# Altium PCB BrushlessMiniModule.PcbDoc
Units mm, origin at the board's own origin, x right, y up, seen from the top; angles counter-clockwise.
Board outline 47 x 47 mm, 2 copper layers (Top Layer, Bottom Layer), stack 1.571 mm thick; 39 components, 29 nets, 126 pads, 60 vias.
Unrouted connection lines stored in the file: 2.
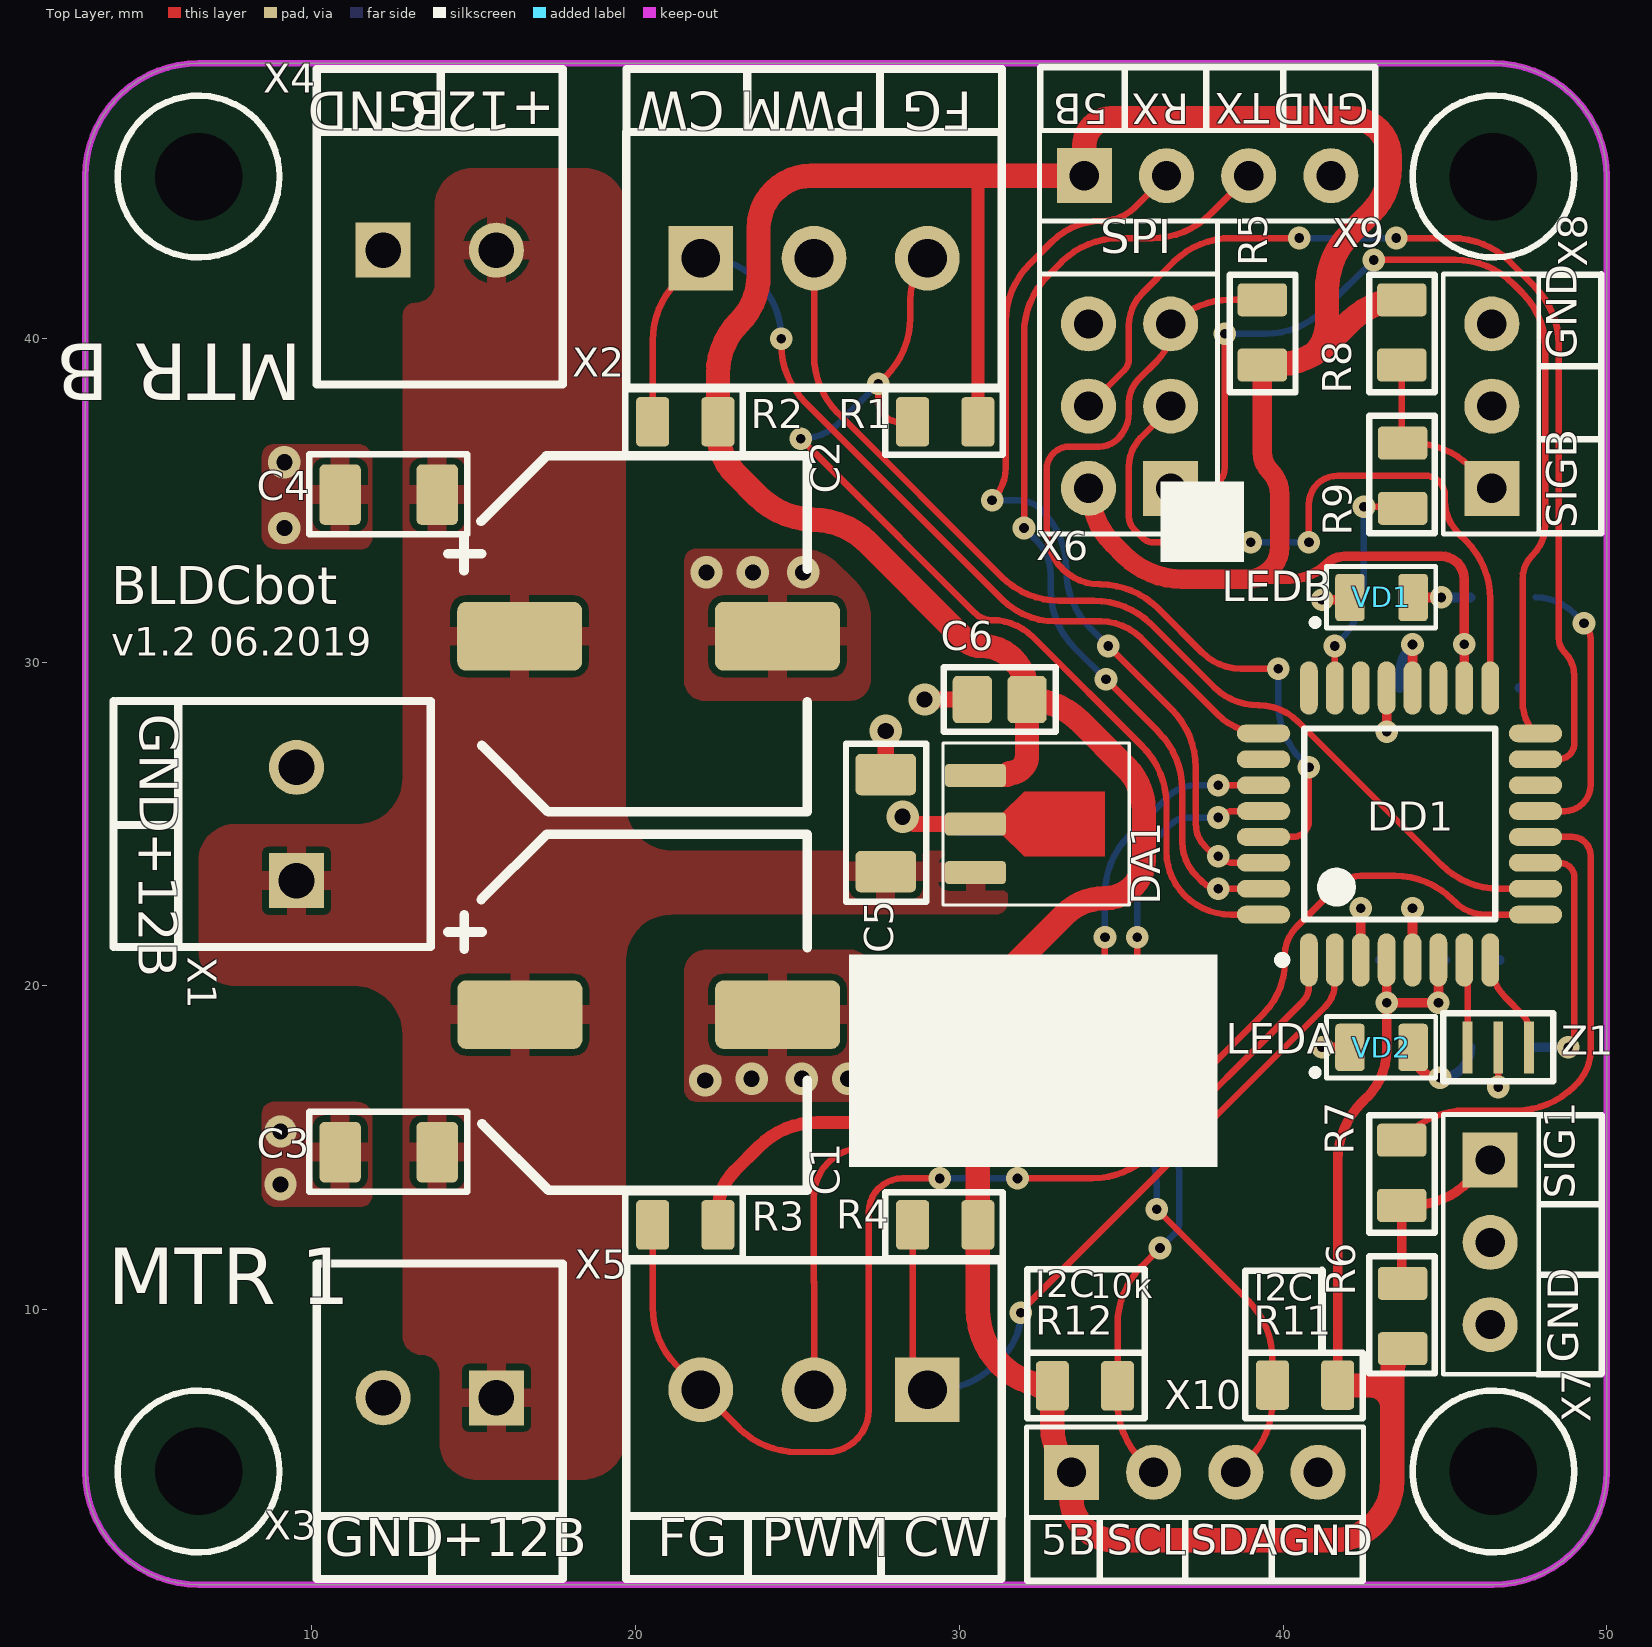
[diagram p0: Top Layer view]
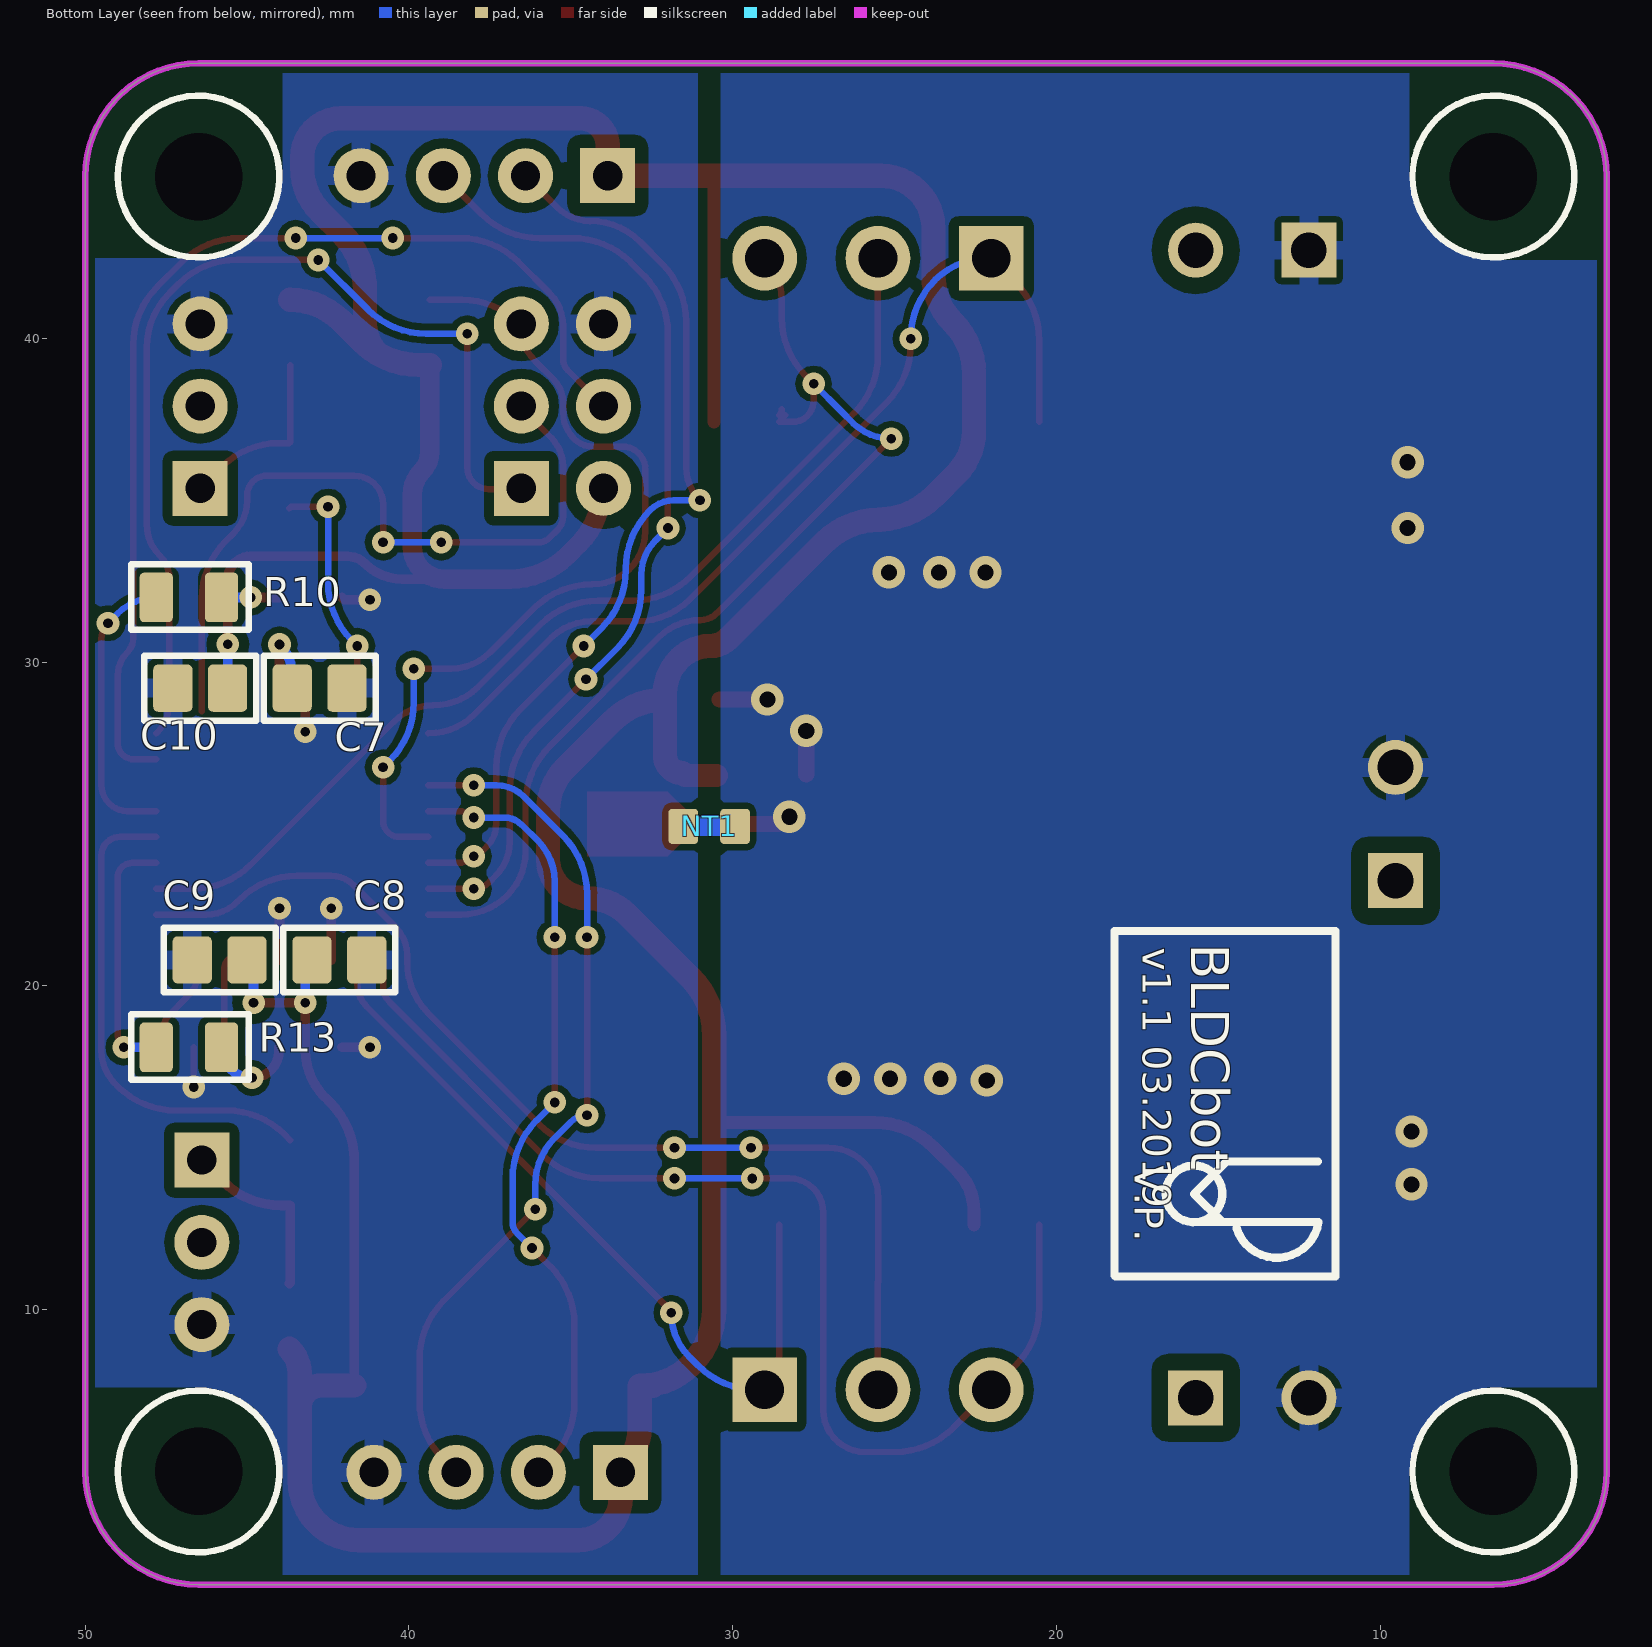
[diagram p1: Bottom Layer view, seen from below]

## Layer stack, top to bottom
Top Solder: solder mask 0.0102, Solder Resist, Dk 3.5
Top Layer: signal copper 0.0356
Dielectric 1: dielectric 1.5, FR-4, Dk 4.8
Bottom Layer: signal copper 0.0356
Bottom Solder: solder mask 0.0102, Solder Resist, Dk 3.5

## Board outline
3,5 3,45 cw(c6.5,45) 6.5,48.5 46.5,48.5 cw(c46.5,45) 50,45 50,5 cw(c46.5,5) 46.5,1.5 6.5,1.5 cw(c6.5,5)

## Design rules (kind name [scope] priority, off if disabled: settings)
Clearance Clearance_POWER_12B [InNet('12B') vs InNet('GND')] p1: gap=0.5
Clearance Clearance_POWER_5B [InNet('5B') vs InNet('DGND')] p2: gap=0.3 except(0.2: SMDPad-SMDPad; 0.4: Arc-THPad Track-THPad THPad-THPad THPad-Fill THPad-Poly THPad-Region)
Clearance [All] p3: gap=0.2 except(0.3: Arc-THPad Track-THPad THPad-THPad THPad-Via THPad-Fill THPad-Poly THPad-Region THPad-Text)
HoleSize [All] p1: absolutevalues=TRUE maxlimit=5 minlimit=0.2 maxpercent=80.000 minpercent=20.000
HoleToHoleClearance [All] p1: gap=0 allowstackedmicrovias=TRUE
MinimumSolderMaskSliver [All] p1: minsoldermaskwidth=0.15
PolygonConnect NetTieDirect [InComponentClass('NetTieDirect')] p1: connectstyle=Direct reliefconductorwidth=0.254 reliefentries=4 polygonreliefangle="90 Angle" airgapwidth=0.254
PolygonConnect NetTieRelief [InComponentClass('NetTieRelief')] p2: connectstyle=Direct reliefconductorwidth=0.6 reliefentries=4 polygonreliefangle="90 Angle" airgapwidth=0.2
PolygonConnect PolygonConnect_GND [HasFootprint('TERMINAL 2 way-5mm') vs InNet('GND')] p3: connectstyle=Direct reliefconductorwidth=0.6 reliefentries=4 polygonreliefangle="90 Angle" airgapwidth=0.2
PolygonConnect PolygonConnect_GND_12B [HasFootprint('TERMINAL 2 way-5mm') vs InNet('12B')] p4: connectstyle=Direct reliefconductorwidth=0.6 reliefentries=4 polygonreliefangle="90 Angle" airgapwidth=0.2
PolygonConnect PolygonConnect_GND_12B_1 [HasFootprint('TERMINAL 3 way-3.5mm') vs InNet('12B')] p5: connectstyle=Direct reliefconductorwidth=0.6 reliefentries=4 polygonreliefangle="90 Angle" airgapwidth=0.2
PolygonConnect PolygonConnect_GND_1 [HasFootprint('TERMINAL 3 way-3.5mm') vs InNet('GND')] p6: connectstyle=Direct reliefconductorwidth=0.6 reliefentries=4 polygonreliefangle="90 Angle" airgapwidth=0.2
PolygonConnect PolygonConnect_via [IsVia] p7: connectstyle=Direct reliefconductorwidth=0.6 reliefentries=4 polygonreliefangle="90 Angle" airgapwidth=0.2
PolygonConnect [All] p8: connectstyle=Relief reliefconductorwidth=0.6 reliefentries=4 polygonreliefangle="90 Angle" airgapwidth=0.2
RoutingVias [All] p1: holewidth=0.711 width=1.27 viastyle="Through Hole" minholewidth=0.711 minwidth=1.27 maxholewidth=0.711 maxwidth=1.27
SilkToSilkClearance [All] p1: silktosilkclearance=0
SilkToSolderMaskClearance [IsPad] p1: minsilkscreentomaskgap=0 clearancetoexposedcopper=TRUE
SolderMaskExpansion [All] p1: expansion=0.05
Width [All] p1: maxlimit=3 minlimit=0.2 preferedwidth=0.3
25 further rules are at their usual default settings.

## Components (designator, comment, footprint, x,y, rotation, side; value= is the part's Value field where it differs from the comment)
C1 "Capacitor_pol" Cap_SMD_radial_polar(10x10.5) 20.406,19.111 r90 top
C2 "Capacitor_pol" Cap_SMD_radial_polar(10x10.5) 20.4,30.8 r90 top
C3 "Capacitor" C1206 12.4,14.886 r0 top
C4 "Capacitor" C1206 12.4,35.2 r0 top
C5 "Capacitor" C1206 27.75,25 r270 top
C6 "Capacitor" C0805 31.247,28.846 r0 top
C7 "Capacitor" C0805 42.763,29.197 r0 bottom
C8 "Capacitor" C0805 42.15,20.8 r0 bottom
C9 "Capacitor" C0805 45.85,20.8 r180 bottom
C10 "Capacitor" C0805 46.45,29.197 r180 bottom
DA1 "L78L05ABUTR" SOT-89-3 30.5,25 r270 top
DD1 "ATmega328P-AU" TQFP-32 43.6,25 r90 top
NT1 "" Pofigistor0603 30.725,24.925 r0 bottom net-tie
R1 "Resistor_0,125Вт" R0805 29.565,37.425 r180 top
R2 "Resistor_0,125Вт" R0805 21.536,37.425 r180 top
R3 "Resistor_0,125Вт" R0805 21.536,12.618 r180 top
R4 "Resistor_0,125Вт" R0805 29.565,12.618 r180 top
R5 "Resistor_0,125Вт" R0805 39.361,40.185 r270 top
R6 "Resistor_0,125Вт" R0805 43.693,9.8 r90 top
R7 "Resistor_0,125Вт" R0805 43.668,14.225 r270 top
R8 "Resistor_0,125Вт" R0805 43.668,40.185 r270 top
R9 "Resistor_0,125Вт" R0805 43.693,35.76 r90 top
R10 "Resistor_0,125Вт" R0805 46.8,32 r180 bottom
R11 "Resistor_0,125Вт" R0805 33.881,7.645 r0 top
R12 "Resistor_0,125Вт" R0805 40.681,7.67 r180 top
R13 "Resistor_0,125Вт" R0805 46.8,18.1 r180 bottom
VD1 "LED" L_0805 43.043,32 r0 top
VD2 "LED" L_0805 43.043,18.1 r0 top
X1 "Вход питания" TERMINAL-2WAY-3.5MM 9.525,25 r90 top
X2 "Управление двигателем А" "TERMINAL 3 way-3.5mm" 25.513,42.475 r0 top
X3 "Двигатель А" TERMINAL-2WAY-3.5MM 13.951,7.275 r180 top
X4 "Двигатель B" TERMINAL-2WAY-3.5MM 13.951,42.725 r0 top
X5 "Управление двигателем В" "TERMINAL 3 way-3.5mm" 25.513,7.525 r180 top
X6 "Программатор ISP mkII" PLS2-6 35.256,38.01 r180 top
X7 "Header_3_plg" PLS-3 46.4,12.075 r0 top
X8 "Header_3_plg" PLS-3 46.45,37.91 r180 top
X9 "UART" PLS-4 37.731,45.027 r90 top
X10 "I2C" PLS-4 37.331,4.973 r90 top
Z1 "QuartzWithCaps" CSTCE 46.65,18.1 r180 top

## Footprints (in the part's own frame and the unit in brackets; to place one, negate y for a bottom-side part, rotate by r counter-clockwise, add the part's x,y. Pads: shape width x height; smd on the part's side, far side on the other; paste and mask are expansions set on the pad)
C0805 [mm]
  rrect25% 1.21x1.46 smd paste-5: 1(-0.845,0) 2(0.845,0)
  silkscreen extent -1.73,-1 1.73,1, body extent -1,-0.62 1,0.63, height 0.78
C1206 [mm]
  rrect25% 1.28x1.87 smd: 1(-1.528,-0.024) 2(1.472,-0.024)
  silkscreen extent -2.48,-1.25 2.4,1.23, body extent -1.6,-0.85 1.6,0.85, height 1.75
Cap_SMD_radial_polar(10x10.5) [mm] "ECAP SMD, 220 мкФ, 35В"
  rrect25% 2.12x3.86 smd: 1(0,3.98) 2(0,-3.98)
  silkscreen extent -5.43,-4.9 5.58,6.2, body extent -4.17,-5.15 4.13,4.75, height 10.2
CSTCE [mm]
  rect 0.3x1.6 smd: 1(-0.95,0) 2(0,0) 3(0.95,0)
  silkscreen extent -1.7,-1.05 1.7,1.05, body extent -1.6,-0.65 1.6,0.65, height 1.02
L_0805 [mm] "SMD LED LAMP"
  rrect25% 0.91x1.46 smd: 1(-0.975,0) 2(0.975,0)
  silkscreen extent -2.15,-0.95 1.68,0.95, body extent -1.01,-0.62 1.01,0.63, height 1.1
PLS2-6 [mm] "Разъем для программатора ISP"
  rect 1.7x1.7 hole 0.9: 1(-1.275,2.64)
  round 1.7 hole 0.9: 2(1.265,2.64) 3(-1.275,0.1) 4(1.265,0.1) 5(-1.275,-2.44) 6(1.265,-2.44)
  silkscreen extent -2.73,-3.98 2.78,4.05, body extent -2.54,-3.81 2.54,3.81, height 8.54
PLS-3 [mm] "Разъем для программатора ISP"
  rect 1.7x1.7 hole 0.9: 1(0,2.54)
  round 1.7 hole 0.9: 2(0,0) 3(0,-2.54)
  silkscreen extent -1.45,-4.08 1.5,3.95, body extent -1.26,-3.91 1.28,3.71, height 8.54
PLS-4 [mm]
  rect 1.7x1.7 hole 0.9: 1(0,3.87)
  round 1.7 hole 0.9: 2(0,1.33) 3(0,-1.21)
  round 1.7 hole 0.9 mask+0.102: 4(0,-3.75)
  silkscreen extent -1.4,-5.15 1.4,5.25, body extent -1.27,-5.02 1.27,5.14, height 9.5
Pofigistor0603 [mm]
  rrect25% 0.92x1.08 smd paste+0: 1(-0.8,0)
  rrect25% 0.92x1.08 smd: 2(0.8,0)
  Top Layer region: -0.8,0.3 0.8,0.3 0.8,-0.3 -0.8,-0.3
R0805 [mm] "Chip Resistor, 2-Leads, Body 2,10x1,30mm, IPC Medium Density"
  rrect25% 1.02x1.53 smd paste-5: 1(-1.007,0) 2(1.007,0)
  silkscreen extent -1.78,-1 1.85,1.02, body extent -1.1,-0.7 1.1,0.7, height 0.55
SOT-89-3 [mm]
  rrect25% 0.7x1.87 smd: 1(-1.5,0) 2(0,0) 3(1.5,0)
  Top Layer region: -0.3,0.8 -1,1.5 -1,4 1,4 1,1.5 0.3,0.8
  silkscreen extent -2.5,-1 2.5,4.75, body extent -2.25,-0.5 2.25,3.75, height 1.54
"TERMINAL 3 way-3.5mm" [mm]
  rect 2x2 hole 1.2: 1(-3.5,0)
  round 2 hole 1.2: 2(0,0) 3(3.5,0)
  silkscreen extent -5.8,-4 5.8,3.9, body extent -5.5,-3.7 5.5,3.6, height 8.5
TERMINAL-2WAY-3.5MM [mm]
  rect 1.7x1.7 hole 1.1: 1(-1.75,0)
  round 1.7 hole 1.1: 2(1.75,0)
  silkscreen extent -3.8,-4.15 3.8,3.65, body extent -3.56,-3.89 3.56,3.4, height 8.51
TQFP-32 [mm] "Thin QFP, 32-Leads, Body 7x7mm, Pitch 0.8mm, IPC Medium Density"
  oval 1.65x0.55 smd: 1(-4.2,2.8) 2(-4.2,2) 3(-4.2,1.2) 4(-4.2,0.4) 5(-4.2,-0.4) 6(-4.2,-1.2) 7(-4.2,-2) 8(-4.2,-2.8) 17(4.2,-2.8) 18(4.2,-2) 19(4.2,-1.2) 20(4.2,-0.4) 21(4.2,0.4) 22(4.2,1.2) 23(4.2,2) 24(4.2,2.8)
  oval 0.55x1.65 smd: 9(-2.8,-4.2) 10(-2,-4.2) 11(-1.2,-4.2) 12(-0.4,-4.2) 13(0.4,-4.2) 14(1.2,-4.2) 15(2,-4.2) 16(2.8,-4.2) 25(2.8,4.2) 26(2,4.2) 27(1.2,4.2) 28(0.4,4.2) 29(-0.4,4.2) 30(-1.2,4.2) 31(-2,4.2) 32(-2.8,4.2)
  silkscreen extent -4.32,-2.95 2.95,3.75, body extent -4.6,-4.6 4.6,4.6, height 1.2

## Part data
C1 C2: library part cap195, "Конденсатор полярный"
C3 C4: library part cap188, "Конденсатор"
C5: library part cap183, "Конденсатор"
C6 C7 C8 C9 C10: library part cap161, "Конденсатор"
DA1: library part pwr6, "Cтабилизатор напряжения (+5В; 0.1А), 4%, (-40...+125C)"
DD1: library part microcont1, "Микроконтроллер 8-Бит, picoPower, AVR, 20МГц, 32КБ Flash"
NT1: library part res1930
R1 R2 R3 R4 R5 R6 R8 R11 R12: library part res97, "Резистор"
R7 R9: library part res49, "Резистор"
R10 R13: library part res65, "Резистор"
VD1 VD2: library part diode8, "Светодиод"
X1 X3 X4: library part connect34, "Разъем - 2 конт. клеммник"
X2 X5: library part connect35, "Разъем - 3 конт. клеммник"
X6: library part connect0, "Разъем - 6 конт. розетка"
X7 X8: library part connect33, "Разъем - 3 конт. вилка"
X9 X10: library part connect14, "Разъем - 4 конт. вилка"
Z1: library part crystal5, "Кварцевый резорнатор со встроенными нагрузочными конденсаторами"

## Free pads (board coordinates)
  round 0 hole 2.7 unplated: ""(6.5,5) ""(6.5,45) ""(46.5,5) ""(46.5,45)

## Via types
v1: diameter 0.7, hole 0.3, Top Layer to Bottom Layer, tented both sides, 46 vias
v2: diameter 1, hole 0.5, Top Layer to Bottom Layer, tented both sides, 14 vias

## Nets (pads, with @x,y where several pads share a name; then routed paths per layer and width w, separated by ;. In a path a pad name is that pad's centre, name@x,y a point inside that pad or via, vN(x,y) a via of type N, cw(c..) or ccw(c..) an arc to the next point about the centre after c; other vN are vias at no path point)
5B: C6.2 C8.2 C9.2 C10.2 DA1.1 DD1.4 DD1.6 DD1.18 R1.1 R2.1 R3.1 R4.1 R5.2 R6.1 R8.1 R11.1 R12.1 X6.2 X9.1 X10.1 | length 169.7
  Top Layer w0.3: 38.9,32.564 40.198,32.564 ccw(c40.198,34.202) 41.356,33.044 cw(c41.9,32.5) 41.9,33.269 44.9,33.269 cw(c44.9,32.573) 45.596,32.573 v1(45.596,30.55) 45.596,29.204 DD1.18 ; R12.1@41.688,7.656 R12.1 41.688,14.598 cw(c44.228,14.598) 42.432,16.395 42.6,16.562 ccw(c41.151,18.011) 43.2,18.011 v1(43.2,19.475) ; DD1.4 v1(43.2,19.475) ; DD1.6 v1(44.8,19.475) v1(43.2,19.475)
  Top Layer w0.4: R3.1 22.543,13.023 cw(c24.342,13.023) 23.07,14.295 23.808,15.034 cw(c25.604,13.237) 25.604,15.777 30.572,15.777 ; 30.478,15.039 cw(c30.478,14.905) 30.572,15 ; R1.1 30.572,45.027
  Top Layer w0.6: X6.2@34.041,35.37 ccw(c36.482,35.37) 34.756,33.644 35.092,33.308 ccw(c36.888,35.104) 36.888,32.564 38.9,32.564 ccw(c38.9,33.564) 39.9,33.564 39.9,35.176 ccw(c38.876,35.176) 39.6,35.9 cw(c40.178,36.478) 39.361,36.478 R5.2
  Top Layer w0.7: DA1.1 31.479,26.5 ; 31.479,26.505 ccw(c31.479,26.575) 31.549,26.575
  Top Layer w0.75: 31.554,26.575 ccw(c31.554,27.114) 32.092,27.114 C6.2 ; R11.1@32.463,7.645 R11.1 32.873,6.391 ccw(c34.879,6.391) X10.1 33.461,4.189 ccw(c34.775,4.189) 34.775,2.875 41.55,2.875 ccw(c41.55,4.7) 43.375,4.7 43.375,6.981 ; R11.1@32.863,7.645 cw(c32.863,9.882) 31.281,8.3 cw(c32.991,10.01) 30.572,10.01 30.572,15.777 30.572,18.469 cw(c33.112,18.469) 31.316,20.265 33.238,22.186 cw(c34.5,20.924) 34.5,22.709 ccw(c34.5,23.914) 35.705,23.914 35.705,25.4 ccw(c33.787,25.4) 35.144,26.756 33.734,28.166 ccw(c32.092,26.524) C6.2 ; R5.2 39.68,39.178 ccw(c39.68,41.718) 40.979,39.535 ; R12.1@41.688,7.656 42.7,7.656 cw(c42.7,6.981) 43.375,6.981 ; R8.1 ccw(c43.668,38.97) 42.096,40.542 41.476,39.922 cw(c39.68,41.718) 40.979,39.535 ; R6.1 ccw(c44.459,8.026) 43.375,8.026 43.375,6.981 ; 25.18,34.427 cw(c25.552,36.94) 23.756,35.144 23.1,35.8 cw(c24.444,37.144) 22.543,37.144 R2.1 22.543,38.915 cw(c24.785,38.915) 23.2,40.5 ccw(c21.751,41.949) 23.8,41.949 23.8,43.4 cw(c25.427,43.4) 25.427,45.027 30.572,45.027 X9.1 33.861,45.961 cw(c34.7,45.961) 34.7,46.8 42.1,46.8 cw(c42.1,45.6) 43.3,45.6 43.3,45.274 cw(c41.357,45.274) 42.731,43.9 42.1,43.27 ccw(c43.896,41.474) 41.356,41.474 41.356,40.446 cw(c40.068,40.446) 40.979,39.535 ; 25.18,34.427 ccw(c25.552,36.94) 25.462,34.402 ; 25.181,34.427 cw(c25.181,32.877) 25.462,34.402 ; 25.462,34.402 cw(c25.462,31.987) 27.169,33.694 30.137,30.727 ccw(c30.684,31.274) 30.684,30.5 cw(c30.684,29.134) 31.65,30.1 cw(c30.582,29.032) 32.092,29.032 C6.2
  Bottom Layer w0.3: C8.2@43,20.805 C8.2 cw(c42.5,20.305) 43.2,20.305 v1(43.2,19.475) ; v1(44.8,19.475) 44.8,20.595 C9.2 ; v1(45.596,30.55) 45.596,29.206 C10.2
12B: C1.1 C2.1 C3.2 C4.2 C5.2 DA1.3 X1.1 X3.1 X4.2
CW/CCW_A: DD1.25 R2.2 X2.1 | length 29.8
  Top Layer w0.2: R2.2 20.528,39.938 cw(c23.068,39.938) 21.272,41.734 X2.1 ; v1(24.5,39.988) 24.5,39.814 ccw(c27.04,39.814) 25.244,38.018 31.314,31.948 ccw(c32.985,33.618) 32.985,31.256 34.372,31.256 cw(c34.372,29.491) 35.62,30.739 37.964,28.395 ccw(c39.4,29.831) DD1.25
  Bottom Layer w0.2: X2.1 22.125,42.475 cw(c22.125,40.168) 23.756,41.799 cw(c21.96,40.003) 24.5,40.003 v1(24.5,39.988)
CW/CCW_B: DD1.2 R4.2 X5.1 | length 24.2
  Top Layer w0.2: R4.2 28.557,8.625 ccw(c30.112,8.625) X5.1 ; v1@31.875,9.925 41.305,19.356 ccw(c40.593,20.068) 41.6,20.068 DD1.2
  Bottom Layer w0.2: X5.1 29.273,7.525 ccw(c29.273,10.065) 31.069,8.269 31.334,8.534 ccw(c29.969,9.9) v1(31.9,9.9)
DGND: C7.1 C8.1 C9.1 C10.1 DD1.3 DD1.5 DD1.21 NT1.2 VD1.1 VD2.1 X6.6 X7.3 X8.3 X9.4 X10.4 Z1.2 | length 7.6
  Top Layer w0.2: v1@46.65,16.925 Z1.2
  Top Layer w0.3: v1(41.207,18.1) VD2.1 ; v1(41.207,31.93) 41.998,31.93 VD1.1 VD1.1@42.069,32 ; DD1.3 v1(42.4,22.4) ; v1(43.2,27.854) DD1.21 ; DD1.5 44.027,20.827 DD1.5@44,20.854 ; v1(44,22.4) DD1.5@44,20.854 ; DD1.5@44.027,20.881 DD1.5@44,20.854
  Bottom Layer w0.3: C9.1@46.686,20.809 C9.1 ; C10.1@47.304,29.206 C10.1@47.313,29.197
  other v1: 46.65,16.875
FG_A: DD1.32 R1.2 X2.3 | length 31.3
  Top Layer w0.2: v1(25.1,36.9) 25.85,36.15 30.488,31.512 ccw(c31,32.024) 31,31.3 cw(c31,29.488) 32.281,30.77 35.657,27.394 cw(c33.861,25.598) 36.401,25.598 36.401,24.147 ccw(c38.311,24.147) 36.96,22.796 ccw(c38.398,24.234) 38.398,22.2 DD1.32 ; v1(27.5,38.6) 27.5,38.083 ccw(c28.183,38.083) 27.7,37.6 ccw(c28.122,38.022) 28.122,37.425 R1.2 ; v1@27.738,38.838 ccw(c25.942,40.634) 28.482,40.634 28.482,41.194 cw(c30.294,41.194) X2.3 ; R1.2@28.379,37.625 28.557,37.625 cw(c28.738,37.806) R1.2@28.482,37.806
  Bottom Layer w0.2: v1(25.1,36.9) ccw(c25.1,38.59) 26.295,37.395 26.624,37.724 v1(27.5,38.6)
FG_B: DD1.1 R3.2 X5.3 | length 35.9
  Top Layer w0.2: R3.2 20.528,10.062 ccw(c23.068,10.062) 21.272,8.266 X5.3 23.194,6.344 ccw(c24.99,8.14) 24.99,5.6 25.903,5.6 ccw(c25.903,6.9) 27.203,6.9 27.203,13.005 cw(c28.25,13.005) 28.25,14.052 v1(29.4,14.052) ; v1(31.8,14.052) 34.1,14.052 ccw(c34.1,16.592) 35.896,14.796 40.6,19.5 ccw(c40.117,19.983) 40.8,19.983 DD1.1 DD1.1@40.83,20.77
  Bottom Layer w0.2: v1(29.4,14.052) v1(31.8,14.052)
GND: C1.2 C2.2 C3.1 C4.1 C5.1 C6.1 DA1.2 NT1.1 X1.2 X3.2 X4.1 | length 4.7
  Top Layer w0.5: C5.1 v2(27.726,27.876) ; v2@28.604,25 DA1.2 ; v2(28.929,28.846) C6.1
  other v2: 9.032,13.867 9.032,15.5 22.15,17.078 23.584,17.128 25.136,17.128 26.57,17.128 28.25,25.225 22.19,32.772 23.624,32.772 25.176,32.772 9.15,34.143 9.15,36.177
MISO: DD1.16 X6.1 | length 30.6
  Top Layer w0.2: X6.1@36.581,35.37 ccw(c36.603,35.37) 36.603,35.348 37.542,35.348 ccw(c37.542,36.006) 38.2,36.006 v1(38.2,40.148) ; v1(42.8,42.425) 45.323,42.425 cw(c45.323,39.885) 47.119,41.681 47.4,41.4 cw(c45.71,39.71) 48.1,39.71 48.1,34.254 cw(c46.751,34.254) 47.705,33.3 ccw(c48.441,32.564) 47.4,32.564 47.4,28.766 ccw(c48.766,28.766) DD1.16
  Bottom Layer w0.2: v1(38.2,40.148) 39.471,40.148 ccw(c39.471,42.688) 41.267,40.892 v1(42.8,42.425)
MOSI: DD1.15 X6.4 | length 33.2
  Top Layer w0.2: X6.4 35.083,39.003 ccw(c34.704,39.383) 35.241,39.383 35.241,40.396 cw(c36.661,40.396) 35.657,41.4 36.613,42.356 cw(c38.409,40.56) 38.409,43.1 v1(40.5,43.1) ; v1(43.5,43.1) 45.225,43.1 cw(c45.225,40.56) 47.021,42.356 47.774,41.603 cw(c45.978,39.806) 48.518,39.806 48.518,30.739 ccw(c49.139,30.739) 48.7,30.3 cw(c47.976,29.576) 49,29.576 49,27.5 cw(c48.5,27.5) 48.5,27 DD1.15
  Bottom Layer w0.2: v1(40.5,43.1) v1(43.5,43.1)
NetC7_2: C7.2 DD1.20 | length 2.8
  Top Layer w0.3: DD1.20 v1(44,30.544)
  Bottom Layer w0.3: C7.2 43.608,29.597 cw(c44.947,29.597) v1(44,30.544)
NetR6_2: R6.2 R7.2 X7.1 | length 5.6
  Top Layer w0.3: R6.2 43.668,10.833 R7.2 43.95,13.218 ccw(c43.95,15.758) 45.746,13.961 X7.1
NetR8_2: R8.2 R9.2 X8.1 | length 5.6
  Top Layer w0.2: R8.2 43.668,36.828 ccw(c43.753,36.828) R9.2 44,36.768 cw(c44,34.228) 45.796,36.024 X8.1
NetR10_2: R10.2 VD1.2 | length 1.8
  Top Layer w0.3: VD1.2 v1(44.886,32)
  Bottom Layer w0.3: v1(44.886,32) R10.2
NetR13_2: R13.2 VD2.2 | length 2.9
  Top Layer w0.3: VD2.2 44.018,17.99 ccw(c44.85,17.99) v1(44.85,17.157)
  Bottom Layer w0.3: v1(44.85,17.157) ccw(c44.85,18.1) R13.2
OSC1: DD1.7 Z1.3 | length 2.7
  Top Layer w0.2: DD1.7 cw(c45.359,20.559) 45.7,20.559 Z1.3
OSC2: DD1.8 Z1.1 | length 3.1
  Top Layer w0.2: DD1.8 ccw(c48.063,20.8) 46.887,19.624 47.4,19.111 cw(c46.917,18.628) 47.6,18.628 Z1.1
PWM_A: DD1.10 X2.2 | length 32.1
  Top Layer w0.2: X2.2 25.513,39.481 ccw(c28.053,39.481) 26.257,37.685 31.298,32.644 ccw(c33.094,34.44) 33.094,31.9 34.148,31.9 cw(c34.148,29.36) 35.944,31.156 37.863,29.237 ccw(c39.245,30.62) 39.245,28.665 cw(c39.245,26.927) 40.474,28.156 44.886,23.744 ccw(c46.682,25.54) 46.682,23 DD1.10
PWM_B: DD1.9 X5.2 | length 33.6
  Top Layer w0.2: X5.2 25.513,10.839 25.5,10.839 25.5,13.455 cw(c27.045,13.455) 27.045,15 v1(29.433,15) ; v1(31.8,15) 34.237,15 ccw(c34.237,17.463) 35.979,15.721 39.382,19.125 ccw(c37.743,20.764) 40.061,20.764 40.061,20.981 cw(c41.219,20.981) 40.4,21.8 41.717,23.117 cw(c42.4,22.434) 42.4,23.4 43.448,23.4 cw(c43.448,20.86) 45.244,22.656 45.3,22.6 ccw(c46.266,23.566) 46.266,22.2 DD1.9
  Bottom Layer w0.2: v1(29.433,15) v1(31.8,15)
RESET: DD1.29 R5.1 X6.5 | length 27.3
  Top Layer w0.2: R5.1 38.373,41.193 ccw(c38.373,38.658) 36.581,40.45 cw(c34.962,40.45) 36.107,39.306 35.539,38.738 ccw(c36.258,38.018) 35.241,38.018 35.241,37.723 cw(c34.077,37.723) 34.9,36.9 cw(c34.321,37.479) 34.321,36.66 33.404,36.66 ccw(c33.404,35.956) 32.7,35.956 32.7,34.048 ccw(c34.348,34.048) 34.348,32.4 cw(c34.348,29.86) 36.144,31.656 37.5,30.3 ccw(c38.707,31.507) 38.707,29.8 v1(39.852,29.8) ; DD1.29 40.3,24.6 ccw(c40.3,25.1) 40.8,25.1 v1(40.8,26.751)
  Bottom Layer w0.2: v1(39.852,29.8) 39.852,28.751 ccw(c42.392,28.751) 40.596,26.955 v1(40.8,26.751)
RX: DD1.30 X9.2 | length 28.5
  Top Layer w0.2: v1(31.013,35) ccw(c29.984,36.029) 31.439,36.029 31.439,40.513 cw(c33.979,40.513) 32.183,42.309 32.865,42.991 cw(c34.4,41.456) 34.4,43.627 ccw(c34.4,45.077) 35.426,44.052 X9.2 ; v1(34.6,30.5) 36.556,28.544 cw(c34.76,26.748) 37.3,26.748 37.3,25.024 ccw(c38.324,25.024) 37.6,24.3 37.829,24.071 ccw(c38,24.241) v1(38,24) ccw(c38.483,24.483) 38.483,23.8 DD1.30
  Bottom Layer w0.2: v1(31.013,35) 31.82,35 cw(c31.82,33.976) 32.544,34.7 32.556,34.688 cw(c30.76,32.892) 33.3,32.892 33.3,32.852 ccw(c35.84,32.852) 34.044,31.056 v1(34.6,30.5)
SCK: DD1.17 X6.3 | length 23.2
  Top Layer w0.2: X6.3@36.581,37.91 35.62,36.949 ccw(c36.535,36.034) 35.241,36.034 35.241,34.484 ccw(c35.784,34.484) 35.4,34.1 35.659,33.841 ccw(c36,34.183) 36,33.7 v1(39,33.7) ; v1(40.8,33.7) 40.8,34.876 cw(c41.684,34.876) 41.684,35.76 44.393,35.76 cw(c44.393,35.153) 45,35.153 45,35 ccw(c46.449,35) 45.424,33.976 45.656,33.744 cw(c43.86,31.948) 46.4,31.948 DD1.17 DD1.17@46.4,28.488
  Bottom Layer w0.2: v1(39,33.7) v1(40.8,33.7)
SCL: DD1.28 R11.2 X10.2 | length 25
  Top Layer w0.2: v1(35.5,16.4) v1(35.5,21.5) v1@35.5,21.6 ; X10.2 35.632,5.342 cw(c37.428,7.138) 34.888,7.138 R11.2 34.888,9.536 cw(c37.428,9.536) 35.632,11.332 v1(36.2,11.9) ; v1@37.9,25.3 v1(38,25.2) cw(c38.483,24.717) 38.483,25.4 DD1.28
  Bottom Layer w0.2: v1(35.5,16.4) 36.056,15.844 cw(c34.26,14.048) 36.8,14.048 36.8,12.688 cw(c36.347,12.688) 36.667,12.367 v1(36.2,11.9) ; v1(35.5,21.5) 35.5,23.228 cw(c37.268,23.228) 36.018,24.478 36.514,24.974 cw(c37.059,24.429) 37.059,25.2 v1(38,25.2)
SDA: DD1.27 R12.2 X10.3 | length 27.1
  Top Layer w0.2: v1(34.5,16) v1(34.5,21.5) ; v1@36.1,13.052 v1(36.1,13.1) 38.929,10.271 cw(c37.133,8.475) 39.673,8.475 R12.2 39.673,7.158 cw(c37.133,7.158) 38.929,5.362 X10.3 ; v1(38,26.2) DD1.27
  Bottom Layer w0.2: v1(34.5,16) cw(c34.5,15.276) 35.012,15.788 35.5,15.3 cw(c34.051,13.851) 36.1,13.851 v1(36.1,13.1) ; v1(34.5,21.5) 34.5,22.841 cw(c37.04,22.841) 35.244,24.637 36.459,25.851 cw(c37.3,25.01) 37.3,26.2 v1(38,26.2)
Sig1: DD1.12 R7.1 | length 15.2
  Top Layer w0.2: R7.1@43.7,15.265 cw(c43.668,15.265) R7.1 43.841,15.406 cw(c45.637,13.61) 45.637,16.15 47.198,16.15 ccw(c47.198,18.69) 48.994,16.894 49.075,16.975 ccw(c48.049,18.001) 49.5,18.001 49.5,24.032 ccw(c48.932,24.032) 48.932,24.6 DD1.12
SIG1_LED: DD1.13 R10.1 | length 9
  Top Layer w0.2: DD1.13 48.7,25.4 ccw(c48.7,26.2) 49.5,26.2 49.5,30.717 ccw(c48.817,30.717) v1(49.3,31.2)
  Bottom Layer w0.2: R10.1 cw(c47.807,30.328) 48.99,31.51 v1(49.3,31.2)
Sig2: DD1.23 R9.1 | length 7.1
  Top Layer w0.2: DD1.23 v1(41.6,30.5) ; v1(42.5,34.8) 43.645,34.8 R9.1
  Bottom Layer w0.2: v1(41.6,30.5) 41.756,30.656 ccw(c39.96,32.452) 42.5,32.452 v1(42.5,34.8)
SIG2_LED: DD1.11 R13.1 | length 7.7
  Top Layer w0.2: DD1.11 48.55,23.8 cw(c48.55,23.35) 49,23.35 49,18.553 cw(c48.36,18.553) v1(48.813,18.1)
  Bottom Layer w0.3: R13.1@47.826,18.1 v1(48.813,18.1)
TX: DD1.31 X9.3 | length 30.1
  Top Layer w0.2: v1(32,34.143) 32,40.148 cw(c34.54,40.148) 32.744,41.944 33.156,42.356 cw(c34.952,40.56) 34.952,43.1 35.962,43.1 ccw(c35.962,45.64) 37.758,43.844 X9.3 ; v1(34.529,29.471) 36.144,27.856 cw(c34.348,26.059) 36.888,26.059 36.888,24.45 ccw(c38.373,24.45) 37.323,23.4 37.528,23.196 ccw(c38,23.668) v1(38,23) DD1.31
  Bottom Layer w0.2: v1(32,34.143) 32.384,33.759 cw(c31.325,32.7) 32.823,32.7 32.823,32.229 ccw(c35.363,32.229) 33.567,30.433 v1(34.529,29.471)
pads on no net: DD1.14 DD1.19 DD1.22 DD1.24 DD1.26 X7.2 X8.2

## Polygon pours and split planes (outlines as drawn)
12B on Top Layer "Top Layer-No Net" (solid, remove dead copper, pour order 2): 15.091,4.75 18.35,4.75 ccw(c18.35,6.1) 19.7,6.1 19.7,20.8 cw(c21.1,20.8) 21.1,22.2 31.1,22.2 ccw(c31.1,22.6) 31.5,22.6 31.5,24.175 21.125,24.175 cw(c21.125,25.6) 19.7,25.6 19.7,44 ccw(c18.45,44) 18.45,45.25 14.95,45.25 ccw(c14.95,44.1) 13.8,44.1 13.8,41.7 cw(c13.2,41.7) 13.2,41.1 ccw(c13.2,40.706) 12.806,40.706 12.806,26.406 cw(c11.4,26.406) 11.4,25 7.65,25 ccw(c7.65,23.85) 6.5,23.85 6.5,21.098 ccw(c7.598,21.098) 7.598,20 11.3,20 cw(c11.3,18.494) 12.806,18.494 12.806,9.194 ccw(c13.4,9.194) 13.4,8.6 cw(c13.4,8.05) 13.95,8.05 13.95,5.892 ccw(c15.091,5.891)
GND on Top Layer "Top Layer-No Net" (solid, remove dead copper, pour order 12): 27.26,29.46 27.26,31.346 ccw(c25.618,31.346) 26.779,32.507 26.243,33.043 ccw(c25.145,31.946) 25.146,33.499 21.861,33.501 ccw(c21.86,33.15) 21.51,33.15 21.51,29.44 ccw(c22.15,29.44) 22.15,28.8 26.6,28.8 ccw(c26.6,29.46)
GND on Top Layer "Top Layer-No Net" (solid, remove dead copper, pour order 6): 11.863,33.839 11.863,36.262 ccw(c11.389,36.262) 11.389,36.736 8.828,36.736 ccw(c8.828,36.367) 8.459,36.367 8.459,33.918 ccw(c8.89,33.918) 8.889,33.487 11.507,33.484 ccw(c11.507,33.839)
GND on Top Layer "Top Layer-No Net" (solid, remove dead copper, pour order 22): 11.863,13.525 11.863,15.948 ccw(c11.389,15.948) 11.389,16.422 8.828,16.422 ccw(c8.828,16.053) 8.459,16.053 8.459,13.604 ccw(c8.89,13.604) 8.889,13.173 11.507,13.17 ccw(c11.507,13.525)
GND on Top Layer "Top Layer-No Net" (solid, remove dead copper, pour order 24): 21.506,20.451 21.506,16.811 ccw(c21.904,16.811) 21.904,16.413 26.906,16.41 ccw(c26.906,16.761) 27.256,16.761 27.256,20.471 ccw(c26.616,20.471) 26.616,21.111 22.166,21.111 ccw(c22.166,20.451)
DGND on Bottom Layer "Top Signal Layer-No Net" (solid, remove dead copper, pour order 26): 31.075,48.5 43.9,48.5 43.9,44.992 ccw(c46.417,44.992) 46.417,42.475 50,42.475 50,7.6 46.494,7.6 ccw(c46.494,5.006) 43.9,5.006 43.9,1.5 31.075,1.5
GND on Bottom Layer "Top Layer-No Net" (solid, remove dead copper, pour order 4): 3,7.6 6.447,7.6 cw(c6.447,4.947) 9.1,4.947 9.1,1.5 30.375,1.5 30.375,48.5 9.1,48.5 9.1,45.118 cw(c6.402,45.118) 6.402,42.42 3,42.42

## Keep-outs
Keep-Out Layer:
  the board outline again, w0.2

## Silkscreen, mask and mechanical layers (free items; w line width, h text height)
Top Overlay:
  circle w0.2: c6.5,45 r2.5
  circle w0.2: c46.5,45 r2.5
  circle w0.2: c46.5,5 r2.5
  circle w0.2: c6.5,5 r2.5
  rectangle: 26.6,14.4 37.981,20.973
  rectangle: 36.213,33.1 38.8,35.575
  lines w0.15: 32.481,41.985 32.481,43.627 ; 37.981,41.985 37.981,43.627
  lines w0.2: 32.106,3.573 32.106,1.623 42.456,1.623 42.456,3.573 ; 32.106,8.67 32.106,11.25 ; 32.506,46.427 32.506,48.377 ; 34.332,1.623 34.332,3.5 ; 35.105,46.449 35.105,48.301 ; 35.731,8.595 35.731,11.25 32.106,11.25 ; 36.981,1.648 36.981,3.5 ; 37.631,46.5 37.631,48.352 ; 38.831,8.62 38.831,11.2 41.2,11.2 ; 39.657,1.674 39.657,3.526 ; 40.004,46.5 40.004,48.377 ; 42.856,46.427 42.856,48.377 32.506,48.377 ; 47.875,8.006 49.825,8.006 ; 47.878,33.984 49.828,33.984 ; 47.9,41.96 49.828,41.96 ; 47.922,16.001 49.85,16.001 ; 47.951,36.886 49.828,36.886 ; 47.951,39.134 49.803,39.134 ; 47.973,11.072 49.85,11.072 ; 47.973,13.25 49.825,13.25 ; 49.828,34.009 49.828,41.775 ; 49.85,8.025 49.85,16.001 ; 32.106,11.25 32.106,11.25 ; 32.506,48.377 32.506,48.377 ; 49.828,41.775 49.828,41.775 ; 49.828,41.775 49.828,41.985 ; 49.828,41.985 49.828,41.985 ; 49.85,16.001 49.85,16.001 ; 49.85,16.001 49.85,16.001
  lines w0.25: 3.875,21.2 3.875,28.8 ; 3.877,24.975 5.827,24.975 ; 3.975,21.2 5.925,21.2 ; 3.975,28.8 5.925,28.8 ; 10.15,46.375 10.15,48.325 17.75,48.325 17.75,46.375 ; 10.151,3.625 10.151,1.675 17.75,1.675 17.75,3.625 ; 13.708,1.675 13.708,3.625 ; 13.983,46.375 13.982,48.325 ; 19.7,3.625 19.7,1.675 31.3,1.675 31.3,3.625 ; 19.725,46.375 19.725,48.325 31.325,48.325 31.325,46.375 ; 23.45,46.375 23.45,48.3 ; 23.475,1.675 23.475,3.625 ; 27.55,46.375 27.55,48.325 ; 27.575,1.7 27.575,3.625 ; 41.2,8.756 41.2,11.2
  text "GND" at 13.572,48 h2 r180
  text "+12B" at 17.507,48 h2 r180
  text "CW" at 22.75,48 h2 r180
  text "PWM" at 27.15,48 h2 r180
  text "FG" at 30.4,48 h2 r180
  text "TX" at 39.575,47.875 h1.6 r180
  text "5B" at 34.6,47.865 h1.6 r180
  text "RX" at 37.1,47.865 h1.6 r180
  text "GND" at 42.65,47.865 h1.6 r180
  text "SPI" at 34.359,42.275 h1.8
  text "MTR B" at 9.7,40.4 h3 r180
  text "GND" at 49.375,39.35 h1.6 r90
  text "SIGB" at 49.375,34.143 h1.6 r90
  text "LEDB" at 38.1,31.572 h1.6
  text "BLDCbot" at 3.8,31.4 h2
  text "v1.2 06.2019" at 3.8,29.9 h1.5
  text "GND" at 4.3,28.4 h2 r270
  text "+12B" at 4.259,24.743 h2 r270
  text "LEDA" at 38.225,17.599 h1.6
  text "SIG1" at 49.325,13.425 h1.6 r90
  text "I2C" at 32.35,10.109 h1.4
  text "10к" at 34.05,10.109 h1.3
  text "I2C" at 39.1,10 h1.4
  text "MTR 1" at 3.7,9.6 h3
  text "GND" at 49.436,8.36 h1.6 r90
  text "5B" at 32.525,2.125 h1.6
  text "SCL" at 34.55,2.125 h1.6
  text "SDA" at 37.15,2.125 h1.6
  text "GND" at 39.857,2.1 h1.6
  text "GND" at 10.401,2 h2
  text "+12B" at 14.018,2 h2
  text "FG" at 20.675,2 h2
  text "PWM" at 23.875,2 h2
  text "CW" at 28.275,2 h2
Bottom Overlay:
  circle w0.254: c15.75,13.575 r0.875
  circle w0.2: c6.5,45 r2.5
  circle w0.2: c46.5,45 r2.5
  circle w0.2: c46.5,5 r2.5
  circle w0.2: c6.5,5 r2.5
  lines w0.25: 11.9,12.7 14.875,12.7 15.75,13.575 14.75,14.575 11.925,14.575 ; 14.4,12.7 15.85,12.7 ; 11.375,11.025 11.375,21.7 18.2,21.7 18.2,11.05 18.175,11.025 11.375,11.025
  lines w0.254: 11.9,12.7 ccw(c13.189,12.905) 14.437,12.524
  text "BLDCbot" at 16.225,21.3 h2 r90
  text "v1.1 03.2019" at 17.625,21.175 h1.5 r90
  text "V.P." at 17.875,14.45 h1.52 r90